# EAGLE board Adapter_board (EAGLE 7.7.0)
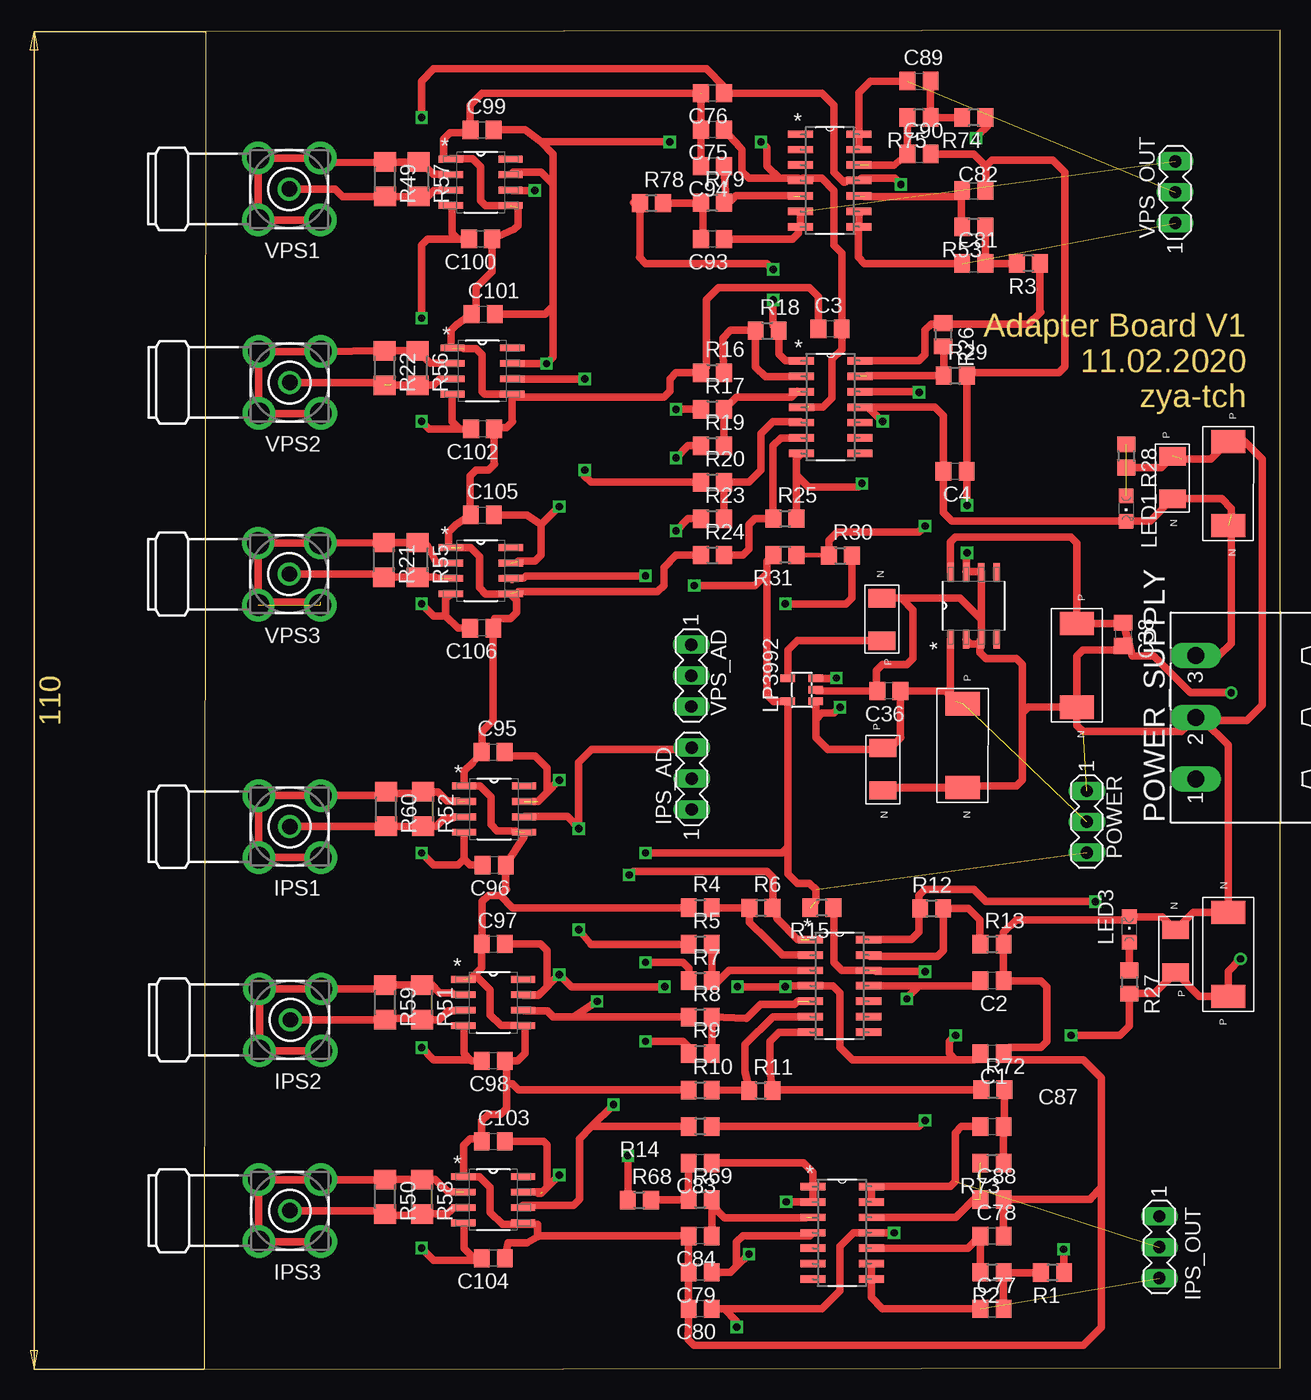
[diagram p0: board, top side]
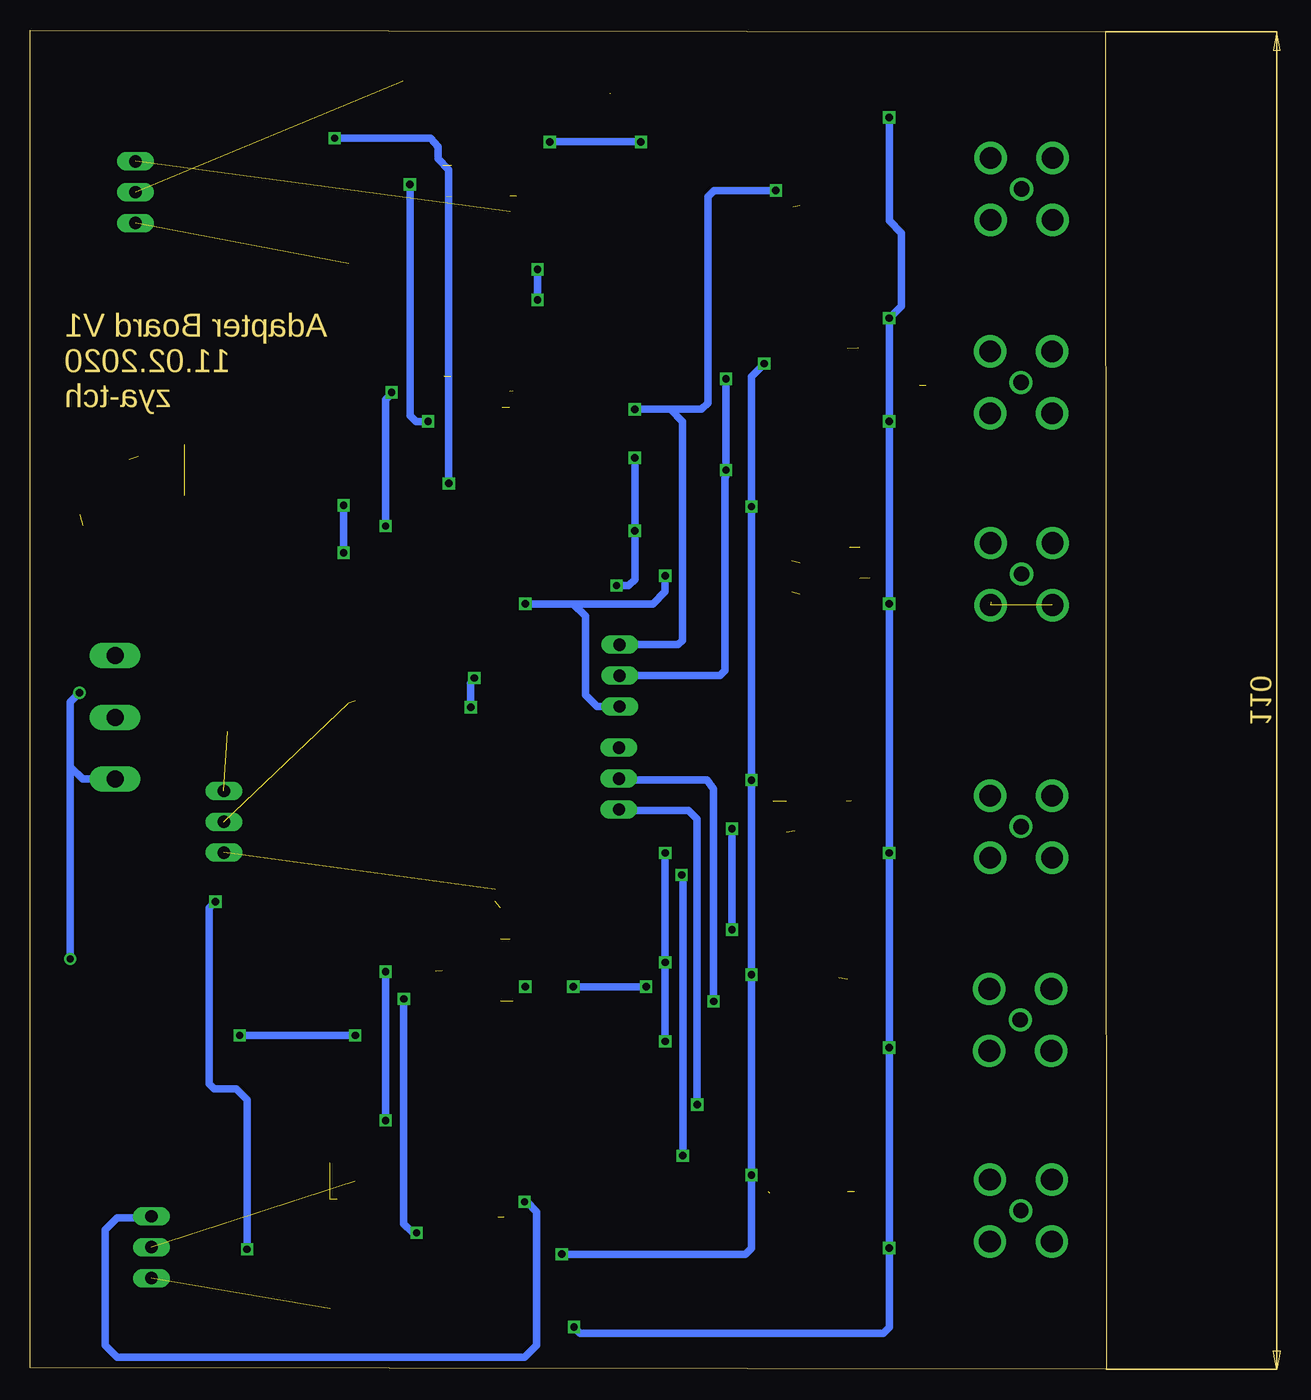
[diagram p1: board, bottom side, seen from below]

Size 88.52 x 110.12 mm. Coordinates in mm from the lower left corner, seen from the top.
Outline: 0,0 88.52,0.13 88.52,110.12 0.1,110 0,0
Copper layers (1*16): Top 0.035mm / dielectric 1.5mm / Bottom 0.035mm
Design rules "default *": minimum track width 10mil, minimum drill 24mil, track to track 8mil, track to pad 8mil, pad to pad 8mil, via to via 8mil, smd to smd 8mil, copper to edge 40mil, drill to drill 8mil, minimum pad ring 10mil, minimum via ring 8mil, stop-mask expansion 4mil, vias tented up to drill 0mil, thermal gap 10mil

## Footprints (pad centres in the part's own frame; a part is rotated, then mirrored left to right if it is on the bottom)
78L05CD15V5V_LIB = smd 1.422 x 0.533: 1 -2.927,1.787; 2 -2.927,0.517; 3 -2.927,-0.753; 4 -2.927,-2.023; 5 2.661,-2.023; 6 2.661,-0.753; 7 2.661,0.517; 8 2.661,1.787
C0805 = smd 1.3 x 1.5: 1 -0.95,0; 2 0.95,0
TANTALUM_C_10UF_KEM = smd 1.9 x 2.8: N 3.45,0; P -3.45,0
BU-SMA-H = drill 1.27: 1 0,0 | drill 1.778: 2 -2.55,2.55; 3 2.55,2.55; 4 2.55,-2.55; 5 -2.55,-2.55
MA03-1 = drill 1.016 long: 1 -2.54,0; 2 0,0; 3 2.54,0
CHIPLED_0805 = smd 1.2 x 1.2: A 0,-1.05; C 0,1.05
SOT23-5L = smd 0.6 x 1.2: 1 -0.95,-1.15; 2 0,-1.15; 3 0.95,-1.15; 4 0.95,1.15; 5 -0.95,1.15
MSTBA3 = drill 1.397 long: 1 -5.08,5.08; 2 0,5.08; 3 5.08,5.08
R0805 = smd 1.3 x 1.5: 1 -0.95,0; 2 0.95,0
R1206 = smd 1.6 x 1.803: 1 -1.422,0; 2 1.422,0
TL084/SO_OP_LIB = smd 2.057 x 0.61: 1 -2.261,3.81; 2 -2.261,2.54; 3 -2.261,1.27; 4 -2.261,0; 5 -2.261,-1.27; 6 -2.261,-2.54; 7 -2.261,-3.81; 8 2.54,-3.81; 9 2.54,-2.54; 10 2.54,-1.27; 11 2.54,0; 12 2.54,1.27; 13 2.54,2.54; 14 2.54,3.81
TANTALUM_C_1UF_KEM = smd 1.5 x 2.2: N 1.75,0; P -1.75,0
AD629_DIFFA_LIB = smd 1.981 x 0.559: 1 -2.464,1.905; 2 -2.464,0.635; 3 -2.464,-0.635; 4 -2.464,-1.905; 5 2.464,-1.905; 6 2.464,-0.635; 7 2.464,0.635; 8 2.464,1.905

## Placement (x,y rotation side)
78L05  78L05CD15V5VONLINE  [78L05CD15V5V_LIB]  63.18,62.93 90 top
C1  0.1u  [C0805]  64.8,25.95 180 top
C2  0.1u  [C0805]  64.8,31.95 180 top
C3  0.1u  [C0805]  51.49,85.57 0 top
C4  0.1u  [C0805]  61.77,73.85 180 top
C36  100n  [C0805]  56.33,55.77 180 top
C37  TANTALUM_C_10UF_KEM  [TANTALUM_C_10UF_KEM]  62.39,51.29 270 top
C38  100n  [C0805]  75.59,60.44 270 top
C75  0.1u  [C0805]  41.8,101.95 180 top
C76  0.1u  [C0805]  41.8,104.95 180 top
C77  2n  [C0805]  64.8,4.95 0 top
C78  1n  [C0805]  64.8,10.95 0 top
C79  0.1u  [C0805]  40.8,7.95 180 top
C80  0.1u  [C0805]  40.8,4.95 180 top
C81  2n  [C0805]  63.3,90.95 0 top
C82  1n  [C0805]  63.3,96.95 0 top
C83  2n  [C0805]  40.8,16.95 180 top
C84  1n  [C0805]  40.8,10.95 180 top
C87  2n  [C0805]  64.8,19.95 0 top
C88  1n  [C0805]  64.8,13.95 0 top
C89  2n  [C0805]  58.8,105.95 0 top
C90  1n  [C0805]  58.8,99.95 0 top
C93  2n  [C0805]  41.8,92.95 180 top
C94  1n  [C0805]  41.8,98.95 180 top
C95  0.1u  [C0805]  23.75,50.77 0 top
C96  0.1u  [C0805]  23.85,41.45 180 top
C97  0.1u  [C0805]  23.78,34.97 0 top
C98  0.1u  [C0805]  23.78,25.35 180 top
C99  0.1u  [C0805]  22.85,101.94 0 top
C100  0.1u  [C0805]  22.73,92.96 180 top
C101  0.1u  [C0805]  22.95,86.78 0 top
C102  0.1u  [C0805]  22.9,77.34 180 top
C103  0.1u  [C0805]  23.78,18.74 0 top
C104  0.1u  [C0805]  23.78,9.12 180 top
C105  0.1u  [C0805]  22.88,70.27 0 top
C106  0.1u  [C0805]  22.83,60.95 180 top
IPS1  BU-SMA-H  [BU-SMA-H]  7.04,44.63 180 top
IPS2  BU-SMA-H  [BU-SMA-H]  7.09,28.73 180 top
IPS3  BU-SMA-H  [BU-SMA-H]  7.05,13.03 180 top
IPS_AD  [MA03-1]  40.11,48.58 90 top
IPS_OUT  [MA03-1]  78.57,10.03 270 top
LED1  [CHIPLED_0805]  75.84,70.8 180 top
LED3  [CHIPLED_0805]  76.1,36.16 0 top
LP3992  LD398525RM  [SOT23-5L]  49.16,55.88 90 top
POWER  [MA03-1]  72.61,45.02 270 top
POWER_SUPPLY  MSTBA3  [MSTBA3]  86.64,53.61 90 top
R1  2.81k  [R0805]  69.78,7.94 180 top
R2  2.81k  [R0805]  64.8,7.95 180 top
R3  2.81k  [R0805]  67.8,90.95 180 top
R4  100k  [R0805]  40.8,37.95 0 top
R5  100k  [R0805]  40.8,34.95 0 top
R6  27.2k  [R0805]  45.8,37.95 0 top
R7  27.2k  [R0805]  40.8,31.95 0 top
R8  100k  [R0805]  40.8,28.95 0 top
R9  27.2k  [R0805]  40.8,25.95 0 top
R10  100k  [R0805]  40.8,22.95 0 top
R11  27.2k  [R0805]  45.79,22.92 0 top
R12  27.2k  [R0805]  59.84,37.9 0 top
R13  100k  [R0805]  64.8,34.95 0 top
R14  100k  [R0805]  40.8,19.95 180 top
R15  27.2k  [R0805]  50.8,37.95 180 top
R16  100k  [R0805]  41.8,81.95 0 top
R17  100k  [R0805]  41.8,78.95 0 top
R18  27.2k  [R0805]  46.31,85.42 0 top
R19  27.2k  [R0805]  41.8,75.95 0 top
R20  100k  [R0805]  41.8,72.95 0 top
R21  424  [R1206]  14.78,66.57 270 top
R22  424  [R1206]  14.85,82.35 270 top
R23  27.2k  [R0805]  41.8,69.95 0 top
R24  100k  [R0805]  41.8,66.95 0 top
R25  27.2k  [R0805]  47.77,69.96 0 top
R26  27.2k  [R0805]  60.79,85.08 270 top
R27  2k  [R0805]  76.1,31.84 270 top
R28  2k  [R0805]  75.84,75.12 270 top
R29  100k  [R0805]  61.78,81.73 0 top
R30  100k  [R0805]  52.33,66.91 0 top
R31  27.2k  [R0805]  47.78,66.97 180 top
R49  424  [R1206]  14.88,97.88 270 top
R50  500  [R1206]  14.89,14.18 270 top
R51  500  [R1206]  17.93,30.16 270 top
R52  500  [R1206]  18,46.06 270 top
R53  2.81k  [R0805]  63.3,93.95 180 top
R55  424  [R1206]  17.56,66.57 270 top
R56  424  [R1206]  17.54,82.35 270 top
R57  424  [R1206]  17.64,97.88 270 top
R58  500  [R1206]  17.93,14.18 270 top
R59  500  [R1206]  14.89,30.16 270 top
R60  500  [R1206]  14.96,46.06 270 top
R68  2.81k  [R0805]  35.79,13.91 0 top
R69  2.81k  [R0805]  40.8,13.95 0 top
R72  2.81k  [R0805]  64.88,22.98 0 top
R73  2.81k  [R0805]  64.8,16.95 180 top
R74  2.81k  [R0805]  63.3,102.95 180 top
R75  2.81k  [R0805]  58.8,102.95 180 top
R78  2.81k  [R0805]  36.79,95.92 0 top
R79  2.81k  [R0805]  41.8,95.95 0 top
U$1  TL084/SO_OPONLINE  [TL084/SO_OP_LIB]  52.12,31.53 0 top
U$2  TL084/SO_OPONLINE  [TL084/SO_OP_LIB]  51.39,79.13 0 top
U$3  TANTALUM_C_1UF_KEMTANTALUM_C_1UF_KEM  [TANTALUM_C_1UF_KEM]  55.84,49.35 270 top
U$4  TL084/SO_OPONLINE  [TL084/SO_OP_LIB]  52.33,11.21 0 top
U$5  TANTALUM_C_1UF_KEMTANTALUM_C_1UF_KEM  [TANTALUM_C_1UF_KEM]  55.74,61.66 90 top
U$6  TL084/SO_OPONLINE  [TL084/SO_OP_LIB]  51.32,97.77 0 top
U$10  TANTALUM_C_1UF_KEMTANTALUM_C_1UF_KEM  [TANTALUM_C_1UF_KEM]  79.91,34.38 90 top
U$11  TANTALUM_C_10UF_KEM  [TANTALUM_C_10UF_KEM]  84.23,34.12 90 top
U$12  TANTALUM_C_1UF_KEMTANTALUM_C_1UF_KEM  [TANTALUM_C_1UF_KEM]  79.65,73.34 270 top
U$14  TANTALUM_C_10UF_KEM  [TANTALUM_C_10UF_KEM]  84.23,72.83 270 top
U$24  AD629_DIFFAONLINE  [AD629_DIFFA_LIB]  23.85,46.06 0 top
U$27  AD629_DIFFAONLINE  [AD629_DIFFA_LIB]  23.78,30.16 0 top
U$28  AD629_DIFFAONLINE  [AD629_DIFFA_LIB]  22.75,97.62 0 top
U$29  AD629_DIFFAONLINE  [AD629_DIFFA_LIB]  22.88,82.1 0 top
U$30  AD629_DIFFAONLINE  [AD629_DIFFA_LIB]  23.78,13.93 0 top
U$31  AD629_DIFFAONLINE  [AD629_DIFFA_LIB]  22.75,65.68 0 top
U$66  TANTALUM_C_10UF_KEM  [TANTALUM_C_10UF_KEM]  71.78,57.9 270 top
VPS1  BU-SMA-H  [BU-SMA-H]  6.99,97.07 180 top
VPS2  BU-SMA-H  [BU-SMA-H]  7.04,81.16 180 top
VPS3  BU-SMA-H  [BU-SMA-H]  6.99,65.4 180 top
VPS_AD  [MA03-1]  40.06,57.05 270 top
VPS_OUT  [MA03-1]  79.88,96.82 90 top

## Library data of the parts
78L05 C37 U$1-U$6 U$10-U$12 U$14 U$24 U$27-U$31 U$66 = Submodule
C1-C4 C36 C38 C75-C84 C87-C90 C93-C106 R1-R31 R49-R53 R55-R60 R68 R69 R72-R75 R78 R79 = rcl
IPS1-IPS3 VPS1-VPS3 = con-coax; OC_FARNELL: unknown; OC_NEWARK: unknown
IPS_AD IPS_OUT POWER VPS_AD VPS_OUT = con-lstb; OC_FARNELL: unknown; OC_NEWARK: unknown
LED1 LED3 = led
LP3992 = st-microelectronics
POWER_SUPPLY = con-phoenix-508; MF: FARNELL; MPN: 1757255; OC_FARNELL: 3705183; OC_NEWARK: 71C4162

## Nets
1.5V_LP: LP3992.5 POWER.3 R7.1 R9.1 R15.2 R19.1 R23.1 R31.2
+5V_78L05: 78L05.1 C36.1 C37.P LP3992.1 LP3992.3 POWER.2 U$3.P
+15V_TMA: 78L05.8 C1.2 C3.2 C38.1 C75.1 C79.1 C95.2 C97.2 C99.2 C101.2 C103.2 C105.2 POWER_SUPPLY.1 R27.2 U$1.4 U$2.4 U$4.4 U$6.4 U$10.P U$11.P U$24.7 U$27.7 U$28.7 U$29.7 U$30.7 U$31.7 U$66.P
-15V_TMA: C2.2 C4.2 C76.1 C80.1 C96.2 C98.2 C100.2 C102.2 C104.2 C106.2 LED1.C POWER_SUPPLY.3 U$1.11 U$2.11 U$4.11 U$6.11 U$12.N U$14.N U$24.4 U$27.4 U$28.4 U$29.4 U$30.4 U$31.4
GND_DIG: 78L05.2 78L05.3 78L05.6 78L05.7 C1.1 C2.1 C3.1 C4.1 C36.2 C37.N C38.2 C75.2 C76.2 C78.2 C79.2 C80.2 C82.2 C84.2 C88.2 C90.2 C94.2 C95.1 C96.1 C97.1 C98.1 C99.1 C100.1 C101.1 C102.1 C103.1 C104.1 C105.1 C106.1 LED3.C LP3992.2 POWER.1 POWER_SUPPLY.2 R4.1 R10.1 R13.2 R16.1 R24.1 R28.2 R29.2 U$3.N U$5.N U$10.N U$11.N U$12.P U$14.P U$24.1 U$24.5 U$27.1 U$27.5 U$28.1 U$28.5 U$29.1 U$29.5 U$30.1 U$30.5 U$31.1 U$31.5 U$66.N
IPS1_AD: IPS_AD.3 R5.1 U$24.6
IPS1_FILTER: C84.1 R69.2 U$4.3
IPS1_N: IPS1.2 IPS1.3 IPS1.4 IPS1.5 R52.1 R60.1 U$24.2
IPS1_OUT: C83.1 IPS_OUT.1 U$4.1 U$4.2
IPS1_P: IPS1.1 R52.2 R60.2 U$24.3
IPS1_SH: R6.2 R68.1 U$1.1
IPS2_AD: IPS_AD.2 R8.1 U$27.6
IPS2_FILTER: C88.1 R73.2 U$4.12
IPS2_N: IPS2.2 IPS2.3 IPS2.4 IPS2.5 R51.1 R59.1 U$27.2
IPS2_OUT: C87.1 IPS_OUT.2 U$4.13 U$4.14
IPS2_P: IPS2.1 R51.2 R59.2 U$27.3
IPS2_SH: R11.2 R72.1 U$1.7
IPS3_AD: IPS_AD.1 R14.2 U$30.6
IPS3_FILTER: C78.1 R2.2 U$4.10
IPS3_N: IPS3.2 IPS3.3 IPS3.4 IPS3.5 R50.1 R58.1 U$30.2
IPS3_OUT: C77.1 IPS_OUT.3 U$4.8 U$4.9
IPS3_P: IPS3.1 R50.2 R58.2 U$30.3
IPS3_SH: R1.1 R12.1 U$1.14
N$2: LP3992.4 U$5.P
N$3: R4.2 R6.1 U$1.2
N$4: R5.2 R7.2 U$1.3
N$5: R16.2 R18.1 U$2.2
N$6: R10.2 R11.1 U$1.6
N$7: R8.2 R9.2 U$1.5
N$8: R17.2 R19.2 U$2.3
N$9: C77.2 R1.2 R2.1
N$10: C81.2 R3.2 R53.1
N$11: C83.2 R68.2 R69.1
N$12: LED3.A R27.1
N$14: LED1.A R28.1
N$15: C87.2 R72.2 R73.1
N$16: R20.2 R23.2 U$2.5
N$17: C89.2 R74.2 R75.1
N$19: C93.2 R78.2 R79.1
N$20: R12.2 R13.1 U$1.13
N$21: R14.1 R15.1 U$1.12
N$22: R24.2 R25.1 U$2.6
N$23: R26.2 R29.1 U$2.13
N$24: R30.1 R31.1 U$2.12
VPS1_AD: R17.1 U$28.6 VPS_AD.1
VPS1_FILTER: C94.1 R79.2 U$6.5
VPS1_N: R49.1 R57.1 U$28.2 VPS1.2 VPS1.3 VPS1.4 VPS1.5
VPS1_OUT: C93.1 U$6.6 U$6.7 VPS_OUT.3
VPS1_P: R49.2 R57.2 U$28.3 VPS1.1
VPS1_SH: R18.2 R78.1 U$2.1
VPS2_AD: R20.1 U$29.6 VPS_AD.2
VPS2_FILTER: C90.1 R75.2 U$6.12
VPS2_N: R22.1 R56.1 U$29.2 VPS2.2 VPS2.3 VPS2.4 VPS2.5
VPS2_OUT: C89.1 U$6.13 U$6.14 VPS_OUT.2
VPS2_P: R22.2 R56.2 U$29.3 VPS2.1
VPS2_SH: R25.2 R74.1 U$2.7
VPS3_AD: R30.2 U$31.6 VPS_AD.3
VPS3_FILTER: C82.1 R53.2 U$6.10
VPS3_N: R21.1 R55.1 U$31.2 VPS3.2 VPS3.3 VPS3.4 VPS3.5
VPS3_OUT: C81.1 U$6.8 U$6.9 VPS_OUT.1
VPS3_P: R21.2 R55.2 U$31.3 VPS3.1
VPS3_SH: R3.1 R26.1 U$2.14

## Tracks (layer width: path | path; a pad name or v marks a point on that pad's centre or on a via)
1.5V_LP  (via drill 0.6)  (2 unrouted)
  Top 0.61: 48.01,42.95 LP3992.5 46.83,54.93 46.3,55.45 46.3,66.45 R31.2 46.3,66.45 46.3,65.45 45.3,64.45 v40.3,64.45 | 48.01,42.95 48.01,40.75 48.8,39.95 49.8,39.95 50.3,39.45 50.3,38.45 | v38.8,68.95 39.8,69.95 R23.1 | R19.1 39.8,75.95 v38.8,74.95 | v36.3,42.45 47.51,42.45 48.01,42.95 | v36.3,33.45 39.37,33.45 39.87,32.95 39.87,31.97 R7.1 | v36.3,26.95 39.37,26.95 39.87,26.45 39.87,25.97 R9.1 39.85,25.83 39.67,25.65 39.67,25.6
  Bottom 0.61: v40.3,64.45 39.3,64.45 38.8,64.95 v38.8,68.95 v38.8,74.95 | v36.3,42.45 v36.3,33.45 v36.3,26.95
+5V_78L05  (via drill 0.6)  (2 unrouted)
  Top 0.61: 61.3,55.45 60.98,55.77 C36.1 57.28,51.98 57.3,51.95 56.8,51.45 56.2,51.45 U$3.P 55.7,50.95 51.3,50.95 50.3,51.95 50.31,51.96 50.31,53.45 | 61.3,55.45 61.8,54.95 | 78L05.1 61.39,55.54 61.3,55.45 | LP3992.1 50.31,53.45 | LP3992.3 51.98,56.83 v52,56.85 | v52.3,54.45 51.8,53.95 50.81,53.95 50.31,53.45
  Bottom 0.61: v52,56.85 52,56.75 52.3,56.45 v52.3,54.45
+15V_TMA  (via drill 0.6)  (4 unrouted)
  Top 0.61: v84.48,55.64 81.11,55.64 78.11,58.65 76.33,58.65 C38.1 75.55,61.35 U$66.P 71.8,61.37 71.8,67.95 71.3,68.45 61.8,68.45 61.39,68.04 78L05.8 | C75.1 44.07,100.5 44.26,100.31 44.26,98.5 44.8,97.95 47.3,97.95 | 49.74,79.13 50.88,79.13 51.64,79.89 51.64,83.07 52.44,83.86 C3.2 52.44,91.82 51.8,92.45 51.8,96.95 50.8,97.95 49.8,97.95 49.24,97.95 U$6.4 48.88,97.95 48.3,97.95 47.3,97.95 | v85.24,33.74 84.23,32.73 U$11.P 81.86,30.68 U$10.P 78.17,30.89 R27.2 76.1,28.25 75.3,27.45 v71.3,27.45 | C99.2 26.39,101.94 27.7,100.95 | 25.22,98.3 U$28.7 25.41,98.45 27.7,98.45 28.7,97.45 | C101.2 26.05,86.78 28.03,86.78 28.7,87.45 | U$29.7 25.37,82.7 26.62,82.7 v28.15,82.7 28.7,83.25 28.7,85.45 28.7,87.45 | C105.2 26.56,70.27 27.7,69.45 | 27.7,69.45 27.7,66.95 27.2,66.45 25.87,66.45 | 28.7,97.45 28.7,98.95 28.7,99.95 27.7,100.95 | 28.7,97.45 28.7,87.45 | v29.2,70.95 27.7,69.45 | C95.2 25.02,50.45 27.2,50.45 28.2,49.45 28.2,47.45 | 28.2,47.45 27.45,46.7 | 28.2,47.45 v29.2,48.45 | C97.2 27.68,34.97 28.2,34.45 28.2,31.45 27.7,30.95 27.65,30.95 27.45,30.75 26.29,30.75 U$27.7 27.55,30.8 v29.2,32.45 30.2,31.45 v37.87,31.45 | C103.2 27.92,18.74 28.2,18.45 28.2,14.95 27.7,14.45 27.45,14.45 27.4,14.5 | U$30.7 27.81,14.56 v29.2,15.95 | C79.1 43.3,7.95 43.8,8.45 | 43.8,8.45 43.8,10.45 44.3,10.95 49.81,10.95 U$4.4 | v44.8,9.45 43.8,8.45 | v61.8,27.45 61.3,26.95 61.3,25.95 61.8,25.45 | 61.8,25.45 63.35,25.45 C1.2 | 61.8,25.45 53.3,25.45 52.3,26.45 52.3,30.95 51.73,31.53 U$1.4 47.88,31.53 v47.8,31.45 v43.87,31.45 | 27.7,100.95 v38.3,100.95 | v45.8,100.95 46.3,100.45 46.3,98.95 47.3,97.95
  Bottom 0.61: 85.24,49.55 84.23,48.53 POWER_SUPPLY.1 | v84.48,55.64 85.24,54.88 85.24,49.55 | v85.24,33.74 85.24,49.55 | v28.15,82.7 29.2,81.65 v29.2,70.95 v29.2,48.45 v29.2,32.45 v29.2,15.95 29.2,9.95 29.7,9.45 v44.8,9.45 | v71.3,27.45 v61.8,27.45 | v38.3,100.95 v45.8,100.95 | v43.87,31.45 v37.87,31.45
-15V_TMA  (via drill 0.6)  (1 unrouted)
  Top 0.61: POWER_SUPPLY.3 83.46,58.69 84.48,59.71 84.48,69.13 U$14.N | 84.48,70.29 84.48,70.8 83.69,71.59 U$12.N 77.81,69.75 LED1.C 61.5,69.75 60.8,70.45 60.8,73.83 C4.2 60.82,78.44 60.1,79.15 54.6,79.15 | C102.2 21.37,77.34 | 21.37,77.34 20.99,77.34 20.37,77.95 20.37,80.15 U$29.4 | C106.2 20.88,60.95 19.87,61.95 | 19.87,61.95 19.87,63.36 U$31.4 | U$28.4 20.37,95.63 20.37,93.45 20.87,92.95 | 20.87,92.95 20.88,92.96 C100.2 | 20.87,92.95 18.37,92.95 17.87,92.45 v17.87,86.45 | v17.87,77.95 18.49,77.34 21.37,77.34 | 21.37,41.95 21.87,41.45 C96.2 | U$24.4 21.37,44.14 21.37,41.95 | 21.37,41.95 20.87,41.45 18.87,41.45 v17.87,42.45 | U$27.4 21.37,28.2 21.37,25.95 21.87,25.45 | 21.87,25.45 21.97,25.35 C98.2 | U$30.4 21.37,11.96 21.37,9.95 22.21,9.12 C104.2 | C104.2 22.67,8.95 | v17.87,9.95 18.87,8.95 22.37,8.95 22.54,9.12 C104.2 | v17.87,26.45 18.87,25.45 21.87,25.45 | v17.87,62.95 18.87,61.95 19.87,61.95 | v17.87,102.95 17.87,105.95 18.87,106.95 41.3,106.95 42.75,105.5 C76.1 50.8,104.95 51.8,103.95 51.8,98.45 52.6,97.65 52.7,97.65 52.8,97.75 53.2,97.75 53.22,97.77 U$6.11 54.04,97.95 56.8,97.95 v57.3,97.45 | v43.8,3.45 43.8,3.95 42.8,4.95 C80.1 50.8,4.95 52.3,6.45 52.3,10.1 53.4,11.2 U$4.11 v56.74,11.21 v56.75,11.2 | U$1.11 58.8,31.53 | 58.8,31.53 63.43,31.53 C2.2 | v57.8,30.45 57.8,30.53 58.8,31.53 | U$2.11 53.95,79.15 54.6,79.15 | 54.6,79.15 v55.8,77.95
  Bottom 0.61: 80.92,58.69 POWER_SUPPLY.3 | v17.87,102.95 17.87,94.45 16.87,93.45 16.87,87.45 v17.87,86.45 v17.87,77.95 v17.87,62.95 v17.87,42.45 v17.87,26.45 v17.87,9.95 17.87,3.45 18.37,2.95 43.3,2.95 v43.8,3.45 | v56.75,11.2 57.05,11.2 57.8,11.95 v57.8,30.45 | v55.8,77.95 56.8,77.95 57.3,78.45 v57.3,97.45
GND_DIG  (via drill 0.6)  (9 unrouted)
  Top 0.61: 78L05.3 63.93,59.63 63.03,59.63 78L05.2 | C104.1 24.98,10.37 26.57,10.37 27.41,10.88 | 27.41,10.88 27.41,11.9 26.24,11.9 | 82.19,53.36 84.23,51.33 U$11.N 81.35,37.58 U$10.N 78.83,37.21 LED3.C 75.84,36.95 66.8,36.95 65.75,35.9 R13.2 C2.1 68.8,31.95 69.3,31.45 69.3,26.95 68.8,26.45 66.25,26.45 C1.1 66.25,25.45 72.3,25.45 73.8,23.95 73.8,14.95 | 82.19,53.36 81.94,53.61 POWER_SUPPLY.2 80.4,52.45 72.81,52.45 72.8,52.45 72.3,52.45 71.8,52.95 71.8,54.93 71.78,54.95 | R28.2 78.73,74.17 U$12.P | 80.42,74.87 82.81,74.87 U$14.P 85.6,76.28 87.02,74.87 87.02,54.63 85.75,53.36 82.19,53.36 | C38.2 75.27,59.17 72.29,59.17 71.78,58.66 71.78,54.95 | 71.78,54.95 U$66.N 67.81,54.45 67.8,54.45 67.3,53.95 | 63.93,61.66 78L05.6 78L05.7 62.72,65.65 62.72,67.12 v62.75,67.15 | 63.93,61.66 78L05.3 | U$5.N 57.35,63.41 | 57.35,63.41 62.18,63.41 63.93,61.66 | 25.63,44.29 24.11,44.29 23.6,44.79 23.6,47.08 22.71,47.97 U$24.1 21.39,49.19 22.07,49.87 C95.1 22.87,50.84 22.87,52.45 23.78,53.36 C106.1 23.88,61.74 25.19,61.74 25.7,62.25 25.7,63.27 25.22,63.75 U$31.5 23.16,63.78 22.65,64.28 22.65,66.82 21.89,67.59 21.13,67.59 | U$24.5 26.32,43.77 C96.1 24.8,39.52 24.87,39.45 24.37,38.95 | U$31.1 20.11,67.76 20.11,68.86 20.72,69.47 C105.1 21.87,70.32 21.87,73.45 22.37,73.95 23.37,73.95 23.87,74.45 23.85,74.47 C102.1 23.97,77.45 24.87,77.45 25.37,77.95 25.34,77.99 U$29.5 | U$29.5 23.05,80.19 22.85,80.4 22.85,83.44 22.34,83.95 21.33,83.95 | U$28.5 23.13,95.72 22.75,96.1 22.75,98.89 22.09,99.55 20.31,99.55 U$28.1 19.83,99.53 19.7,99.66 19.7,101.18 20.21,101.69 21.65,101.69 C99.1 21.87,101.96 21.87,103.95 22.87,104.95 40.8,104.95 40.85,104.9 C75.2 C94.2
  Top 0.61: 25.8,95.59 25.8,94.07 25.5,93.76 C100.1 23.68,90.26 22.37,88.95 22.37,87.15 C101.1 20.72,85.88 20.31,85.48 20.31,84.1 U$29.1 | 24.37,38.95 23.37,38.95 22.87,38.45 22.87,35.02 C97.1 22.83,33.02 22,32.2 22.51,32.2 23.53,31.18 23.53,29.15 24.41,28.26 U$27.5 26.37,28.13 26.37,25.95 25.77,25.35 C98.1 24.87,25.21 24.87,23.45 | 24.87,23.45 24.87,21.45 24.37,20.95 23.37,20.95 22.83,20.41 C103.1 22.61,18.95 21.87,18.95 21.32,18.4 21.32,16.22 U$30.1 22.64,15.83 23.53,14.94 23.53,12.91 24.54,11.9 25.56,11.9 26.24,11.9 | 27.41,10.88 27.48,10.95 C84.2 C79.2 C80.2 39.85,3 39.8,2.95 39.8,2.45 40.3,1.95 72.3,1.95 73.8,3.45 73.8,14.95 | R10.1 25.87,22.95 25.37,23.45 24.87,23.45 | R24.1 38.8,66.95 37.8,65.95 37.8,64.45 37.3,63.95 25.87,63.95 | U$29.5 25.58,79.95 37.8,79.95 38.3,80.45 38.3,81.45 38.8,81.95 R16.1 41.3,82.4 41.3,87.95 42.3,88.95 49.8,88.95 50.54,88.22 C3.1 | R4.1 25.37,37.95 24.37,38.95 | C88.2 C78.2 65.75,13.83 65.87,13.95 72.87,13.95 72.87,14.02 73.8,14.95 | LP3992.2 50.41,55.77 C36.2 55.3,55.85 55.3,57.45 55.8,57.95 57.8,57.95 58.3,58.45 58.3,62.45 57.35,63.41 | U$3.N 56.08,47.84 | 56.08,47.84 C37.N | 56.08,47.84 56.11,47.8 63.35,47.8 63.5,47.95 66.8,47.95 67.3,48.45 67.3,53.95 | v62.75,71.05 62.75,73.81 C4.1 62.73,73.86 R29.2 62.95,81.95 70.3,81.95 70.8,82.45 70.8,98.45 69.8,99.45 64.8,99.45 64.3,98.95 | 64.3,98.95 64.3,97 C82.2 | C90.2 63.3,99.95 64.3,98.95 | 67.3,53.95 67.3,57.95 66.8,58.45 64.3,58.45 63.8,58.95 63.8,59.88 78L05.3 | 26.24,11.9 U$30.5
  Bottom 0.61: v62.75,67.15 v62.75,71.05
IPS1_AD  (via drill 0.6)
  Top 0.61: R5.1 31.8,34.95 v30.8,36.15 | U$24.6 26.34,45.45 29.87,45.45 30.8,44.52 v30.8,44.45 30.8,49.88 31.87,50.95 39.95,50.95 IPS_AD.3
  Bottom 0.61: v30.8,36.15 v30.8,44.45
IPS1_FILTER  (1 unrouted)
  Top 0.61: 49.56,12.5 49.51,12.45 49.5,12.45 42.8,12.45 41.75,13.5 R69.2 C84.1
IPS1_N  (1 unrouted)
  Top 0.61: IPS1.2 IPS1.3 IPS1.4 IPS1.5 14.96,47.18 R60.1 14.82,47.34 17.5,47.34 R52.1 19.24,47.48 19.97,46.75 20.97,46.75
IPS1_OUT  (via drill 0.6)
  Top 0.61: C83.1 49.3,16.95 50.07,16.19 U$4.1 U$4.2 v47.87,13.75
  Bottom 0.61: v47.87,13.75 47.67,13.75 46.87,12.95 46.87,1.95 47.87,0.95 81.37,0.95 82.37,1.95 82.37,11.45 81.37,12.45 78.69,12.45 IPS_OUT.1
IPS1_P
  Top 0.254: R60.2 R52.2 | 20.47,45.35 21.31,45.35 U$24.3
  Top 0.61: IPS1.1 17.49,44.63 R52.2 19.06,44.64 19.77,45.35 20.47,45.35
IPS1_SH  (via drill 0.6)  (1 unrouted)
  Top 0.61: 49.07,35.34 48.82,35.34 47.1,37.05 R6.2 46.8,38 46.8,40.45 46.3,40.95 35.3,40.95 35,40.65 v34.95,40.65 | R68.1 34.84,17.54 v34.85,17.55
  Bottom 0.61: 34.9,40.6 v34.95,40.65 34.85,40.55 v34.85,17.55
IPS2_AD  (via drill 0.6)
  Top 0.61: R8.1 30.22,28.95 | 30.22,28.95 28.72,28.95 | 28.72,28.95 28.7,28.95 28.2,29.45 | 28.2,29.45 26.32,29.45 U$27.6 | 28.2,29.45 28.22,29.45 28.72,28.95 | 30.22,28.95 30.37,28.95 v32.32,30.25
  Bottom 0.61: v32.32,30.25 32.32,47.7 32.87,48.45 39.99,48.45 IPS_AD.2
IPS2_FILTER  (2 unrouted)
  Top 0.61: U$4.12 61.83,12.48 63.3,13.95
IPS2_N
  Top 0.254: 20.37,30.95 21.16,30.95 U$27.2
  Top 0.61: IPS2.2 IPS2.3 IPS2.4 IPS2.5 14.58,31.28 R59.1 R51.1 18.74,31.59 19.37,30.95 20.37,30.95
IPS2_OUT  (1 unrouted)
  Top 0.61: U$4.13 U$4.14 61.37,15.02 61.8,15.45 61.8,19.45 62.3,19.95 C87.1
IPS2_P
  Top 0.254: 20.63,29.5 21.29,29.5 U$27.3
  Top 0.61: 20.63,29.5 20.6,29.48 20.07,29.48 19.33,28.74 R51.2 17.32,28.86 15.07,28.86 R59.2 14.88,28.73 IPS2.1
IPS2_SH
  Top 0.61: U$1.7 47.29,27.72 46.53,26.96 46.53,24.61 R11.2 46.8,22.98 R72.1
IPS3_AD  (via drill 0.6)
  Top 0.61: R14.2 31.87,19.95 | 31.87,19.95 30.87,18.95 30.87,13.95 30.37,13.45 26.24,13.45 U$30.6 | v33.67,21.75 31.87,19.95
  Bottom 0.61: v33.67,21.75 33.67,45.25 34.37,45.95 40.03,45.95 IPS_AD.1
IPS3_FILTER
  Top 0.61: R2.2 C78.1 63.8,10.95 62.8,9.95 54.88,9.95 U$4.10
IPS3_N  (1 unrouted)
  Top 0.61: 20.76,14.56 20.05,14.56 19,15.6 R58.1 R50.1 14.86,15.58 IPS3.5 IPS3.4 IPS3.3 IPS3.2
IPS3_OUT  (1 unrouted)
  Top 0.61: U$4.9 U$4.8 54.87,5.89 55.8,4.95 C77.1
IPS3_P
  Top 0.254: U$30.3 20.53,13.29 20.31,13.08
  Top 0.61: 19.89,12.66 20,12.76 | 20,12.76 20.31,13.08 20.48,13.24 | 20,12.76 R58.2 17.83,12.66 14.79,12.66 R50.2 14.62,13.03 IPS3.1
IPS3_SH  (via drill 0.6)
  Top 0.61: U$1.14 58.19,35.34 58.8,35.95 58.8,37.81 | 58.8,37.81 R12.1 | R1.1 70.73,9.82 v70.7,9.85 | v73.3,38.45 64.3,38.45 63.3,39.45 59.3,39.45 58.8,38.95 58.8,37.81
  Bottom 0.61: v70.7,9.85 70.7,22.15 71.6,23.05 73.4,23.05 73.8,23.45 73.8,37.95 v73.3,38.45
N$2
  Top 0.61: LP3992.4 48.01,59.16 48.8,59.95 55.7,59.95 U$5.P
N$3
  Top 0.61: U$1.2 47.55,34.07 46.28,35.34 44.85,36.77 R6.1 R4.2
N$4
  Top 0.61: R5.2 R7.2 42.3,31.95 43.15,32.8 U$1.3
N$5
  Top 0.61: R16.2 42.67,83.4 42.67,84.82 43.3,85.45 45.33,85.45 R18.1 45.36,82.44 46.15,81.65 49.11,81.65 U$2.2
N$6
  Top 0.61: R10.2 R11.1 44.5,24.48 44.5,26.7 46.78,28.99 U$1.6
N$7  (1 unrouted)
  Top 0.61: 48.82,30.26 48.56,30 45.77,30 44.62,28.86 R8.2 R9.2
N$8  (1 unrouted)
  Top 0.61: R19.2 R17.2 42.8,78.95 43.8,79.95 48.3,79.95 48.8,80.45
N$9
  Top 0.61: R1.2 65.77,7.94 R2.1 C77.2
N$10
  Top 0.61: 64.4,93.71 R53.1 C81.2 R3.2
N$11
  Top 0.61: C83.2 R69.1 39.3,13.95 39.26,13.91 R68.2
N$12
  Top 0.61: LED3.A R27.1
N$14  (1 unrouted)
N$15
  Top 0.61: 65.56,16.9 R73.1 C87.2 65.83,20.03 R72.2
N$16
  Top 0.61: R23.2 R20.2 44.8,72.95 45.8,73.95 45.8,76.95 46.8,77.95 49.03,77.95 U$2.5
N$17
  Top 0.61: C89.2 R75.1 R74.2
N$19
  Top 0.61: R78.2 40.82,95.92 R79.1 41.03,96.08 41.03,93.13 C93.2
N$20
  Top 0.61: 63.8,35.13 R13.1 63.8,35 63.8,36.95 62.86,37.9 R12.2 60.79,34.97 60.8,34.95 60.8,34.45 60.3,33.95 54.77,33.95 U$1.13
N$21  (via drill 0.6)  (1 unrouted)
  Top 0.61: U$1.12 52.46,32.8 51.8,33.45 51.8,37.9 R15.1 | R14.1 58.8,19.95 v59.3,20.45 | v59.3,32.7 55.25,32.7 55.2,32.75
  Bottom 0.61: v59.3,20.45 v59.3,32.7
N$22
  Top 0.61: U$2.6 47.44,76.59 46.8,75.95 46.8,69.98 R25.1 45.3,69.95 44.8,69.45 44.8,67.45 44.3,66.95 R24.2
N$23  (1 unrouted)
  Top 0.61: R26.2 60.83,84.09 R29.1 54.53,81.73 54.5,81.7
N$24  (via drill 0.6)
  Top 0.406: R30.1 R31.1
  Top 0.61: U$2.12 58.76,80.4 v58.8,80.35 | v59.3,69.35 58.8,68.85 52.1,68.85 51.4,68.15 51.4,66.94 R30.1
  Bottom 0.61: v58.8,80.35 58.8,80.25 59.3,79.75 v59.3,69.35
VPS1_AD  (via drill 0.6)
  Top 0.61: U$28.6 25.84,96.99 25.87,96.95 | R17.1 v38.8,78.95 | v27.2,96.95 25.87,96.95 | 25.87,96.95 25.37,96.95
  Bottom 0.61: v38.8,78.95 35.87,78.95 | 35.87,78.95 33.3,78.95 32.8,79.45 32.8,96.45 32.3,96.95 v27.2,96.95 | VPS_AD.1 35.24,59.59 34.87,59.95 34.87,77.95 35.87,78.95
VPS1_FILTER  (1 unrouted)
  Top 0.61: 48.51,96.49 48.51,96.5 48.5,96.51 43.73,96.51 43.34,96.12 R79.2 42.91,96.13 C94.1
VPS1_N
  Top 0.254: 19.5,98.31 20.24,98.31 U$28.2
  Top 0.61: VPS1.2 VPS1.3 VPS1.4 VPS1.5 9.9,99.25 R49.1 R57.1 17.83,99.3 18.82,98.31 19.5,98.31
VPS1_OUT  (1 unrouted)
  Top 0.61: U$6.6 49.06,93.98 49.05,93.97 U$6.7 48.87,93.77 48.87,93.45 48.37,92.95 C93.1
VPS1_P
  Top 0.254: 19.37,96.95 20.25,96.95 U$28.3
  Top 0.61: VPS1.1 10.76,97.07 11.37,96.45 R57.2 | R49.2 R57.2 | R57.2 18.38,96.46 18.87,96.95 19.37,96.95
VPS1_SH  (via drill 0.6)
  Top 0.61: 35.3,95.95 35.34,95.92 R78.1 35.84,91.49 35.8,91.45 36.3,90.95 46.3,90.95 v46.8,90.45 | U$2.1 49.11,82.95 47.8,82.95 47.27,83.49 R18.2 46.8,85.88 v46.8,87.95
  Bottom 0.61: v46.8,90.45 v46.8,87.95
VPS2_AD  (via drill 0.6)
  Top 0.61: R20.1 31.8,72.95 31.3,73.45 v31.3,73.95 | v31.3,81.45 U$29.6
  Bottom 0.61: v31.3,81.45 v31.3,73.95 31.3,73.45 31.37,73.38 31.37,57.45 31.78,57.05 VPS_AD.2
VPS2_FILTER  (1 unrouted)
  Top 0.61: 54.62,99.04 56.74,99.04 C90.1 R75.2
VPS2_N
  Top 0.254: 19.73,82.73 U$29.2
  Top 0.61: VPS2.2 VPS2.3 VPS2.4 VPS2.5 R22.1 R56.1 18.59,82.76 19.73,82.73
VPS2_OUT  (1 unrouted)
  Top 0.61: U$6.13 U$6.14 53.86,105.01 54.8,105.95 C89.1
VPS2_P  (1 unrouted)
  Top 0.254: 19.37,81.45 U$29.3
  Top 0.61: VPS2.1 15.17,81.16 15.37,80.95 | R22.2 R56.2 18.85,80.93 19.37,81.45
VPS2_SH  (via drill 0.6)
  Top 0.61: R25.2 48.72,74.92 U$2.7 48.97,75.32 48.7,75.05 48.7,73.55 49.7,72.55 53.8,72.55 v54.1,72.85 | v63.5,101.25 63.7,101.55 64.4,102.25 64.4,102.8 R74.1
  Bottom 0.61: v54.1,72.85 54.1,98.65 55,99.55 55,100.55 55.6,101.25 v63.5,101.25
VPS3_AD  (via drill 0.6)
  Top 0.61: R30.2 53.28,63.43 52.8,62.95 v47.8,62.95 | 25.31,64.95 U$31.6 25.23,65.05 26.27,65.05 26.47,65.25 v36.3,65.25
  Bottom 0.61: v47.8,62.95 43.87,62.95 | 43.87,62.95 37.3,62.95 36.3,63.95 v36.3,65.25 36.37,65.18 | VPS_AD.3 41.93,54.51 42.87,55.45 42.87,61.95 43.87,62.95
VPS3_FILTER  (1 unrouted)
  Top 0.61: 62.3,96.45 62.3,96.95 C82.1 62.35,96.5 62.3,96.45 | 62.3,96.45 62.3,94 R53.2 | 62.3,96.45 54.3,96.45
VPS3_N  (2 unrouted)
  Top 0.61: U$31.2 19.1,66.32 18.59,67.33 18.33,67.76 R55.1 R21.1 VPS3.5 VPS3.4 4.45,63.11 9.53,63.11
VPS3_OUT  (1 unrouted)
  Top 0.61: C81.1 54.3,90.95 53.8,91.45 53.8,93.9 U$6.8 U$6.9
VPS3_P  (1 unrouted)
  Top 0.61: VPS3.1 14.53,65.4 R21.2 R55.2 18.98,65.15 19.07,65.05 19.47,65.05
VPS3_SH
  Top 0.61: U$2.14 58.29,82.94 58.3,82.95 58.8,82.95 59.3,83.45 59.3,85.45 59.8,85.95 60.71,85.95 R26.1 60.87,85.95 67.8,85.95 68.8,86.95 68.75,87 R3.1

## Text on the board
Dimension: Adapter Board V1 / 11.02.2020 / zya-tch